# Altium PCB vehRec.PcbDoc
Units mil, origin at the board's own origin, x right, y up, seen from the top; angles counter-clockwise.
Board outline 3900 x 3300 mil, 2 copper layers (Top Layer, Bottom Layer); 122 components, 143 nets, 464 pads, 150 vias.
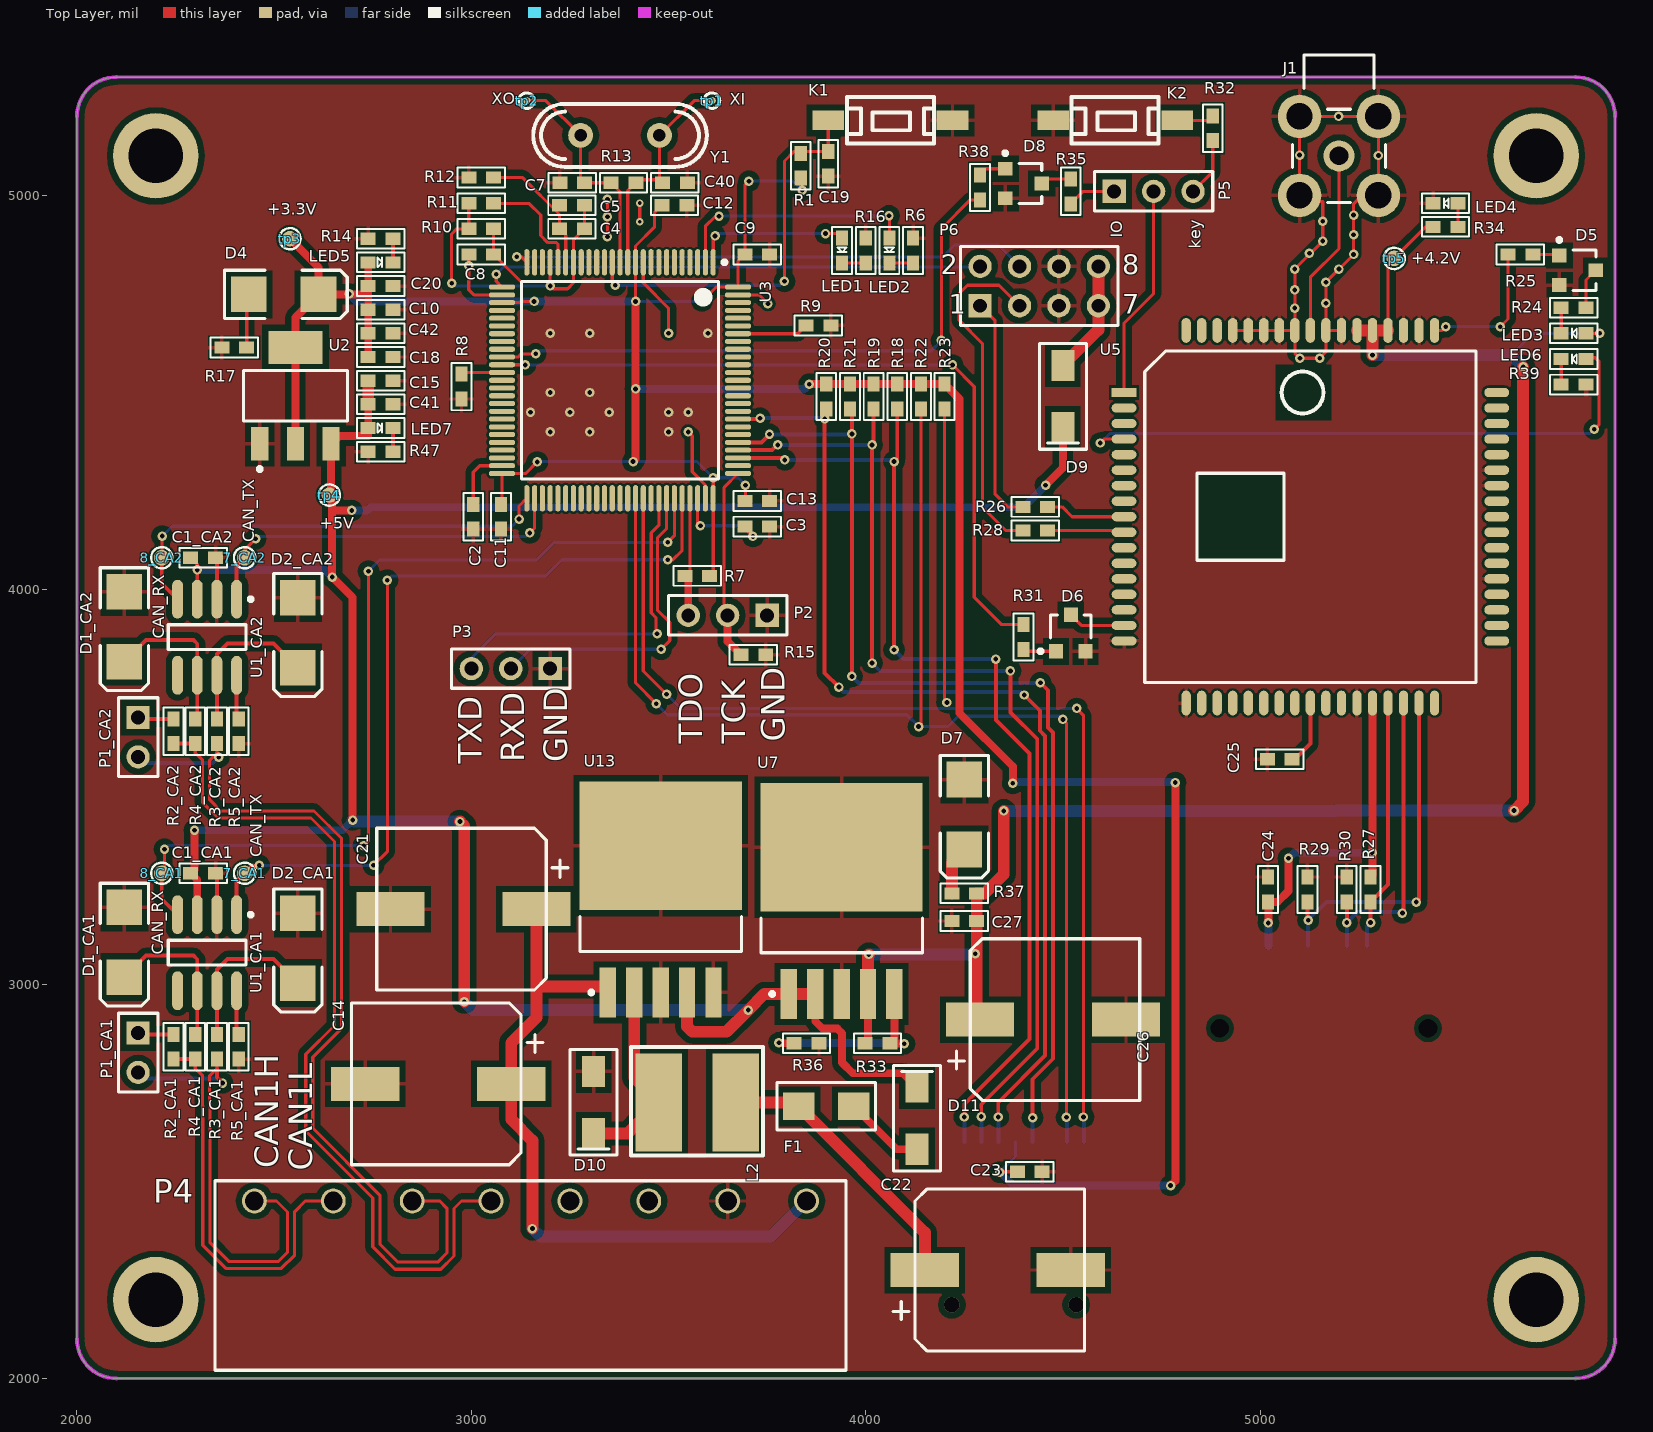
[diagram p0: Top Layer view]
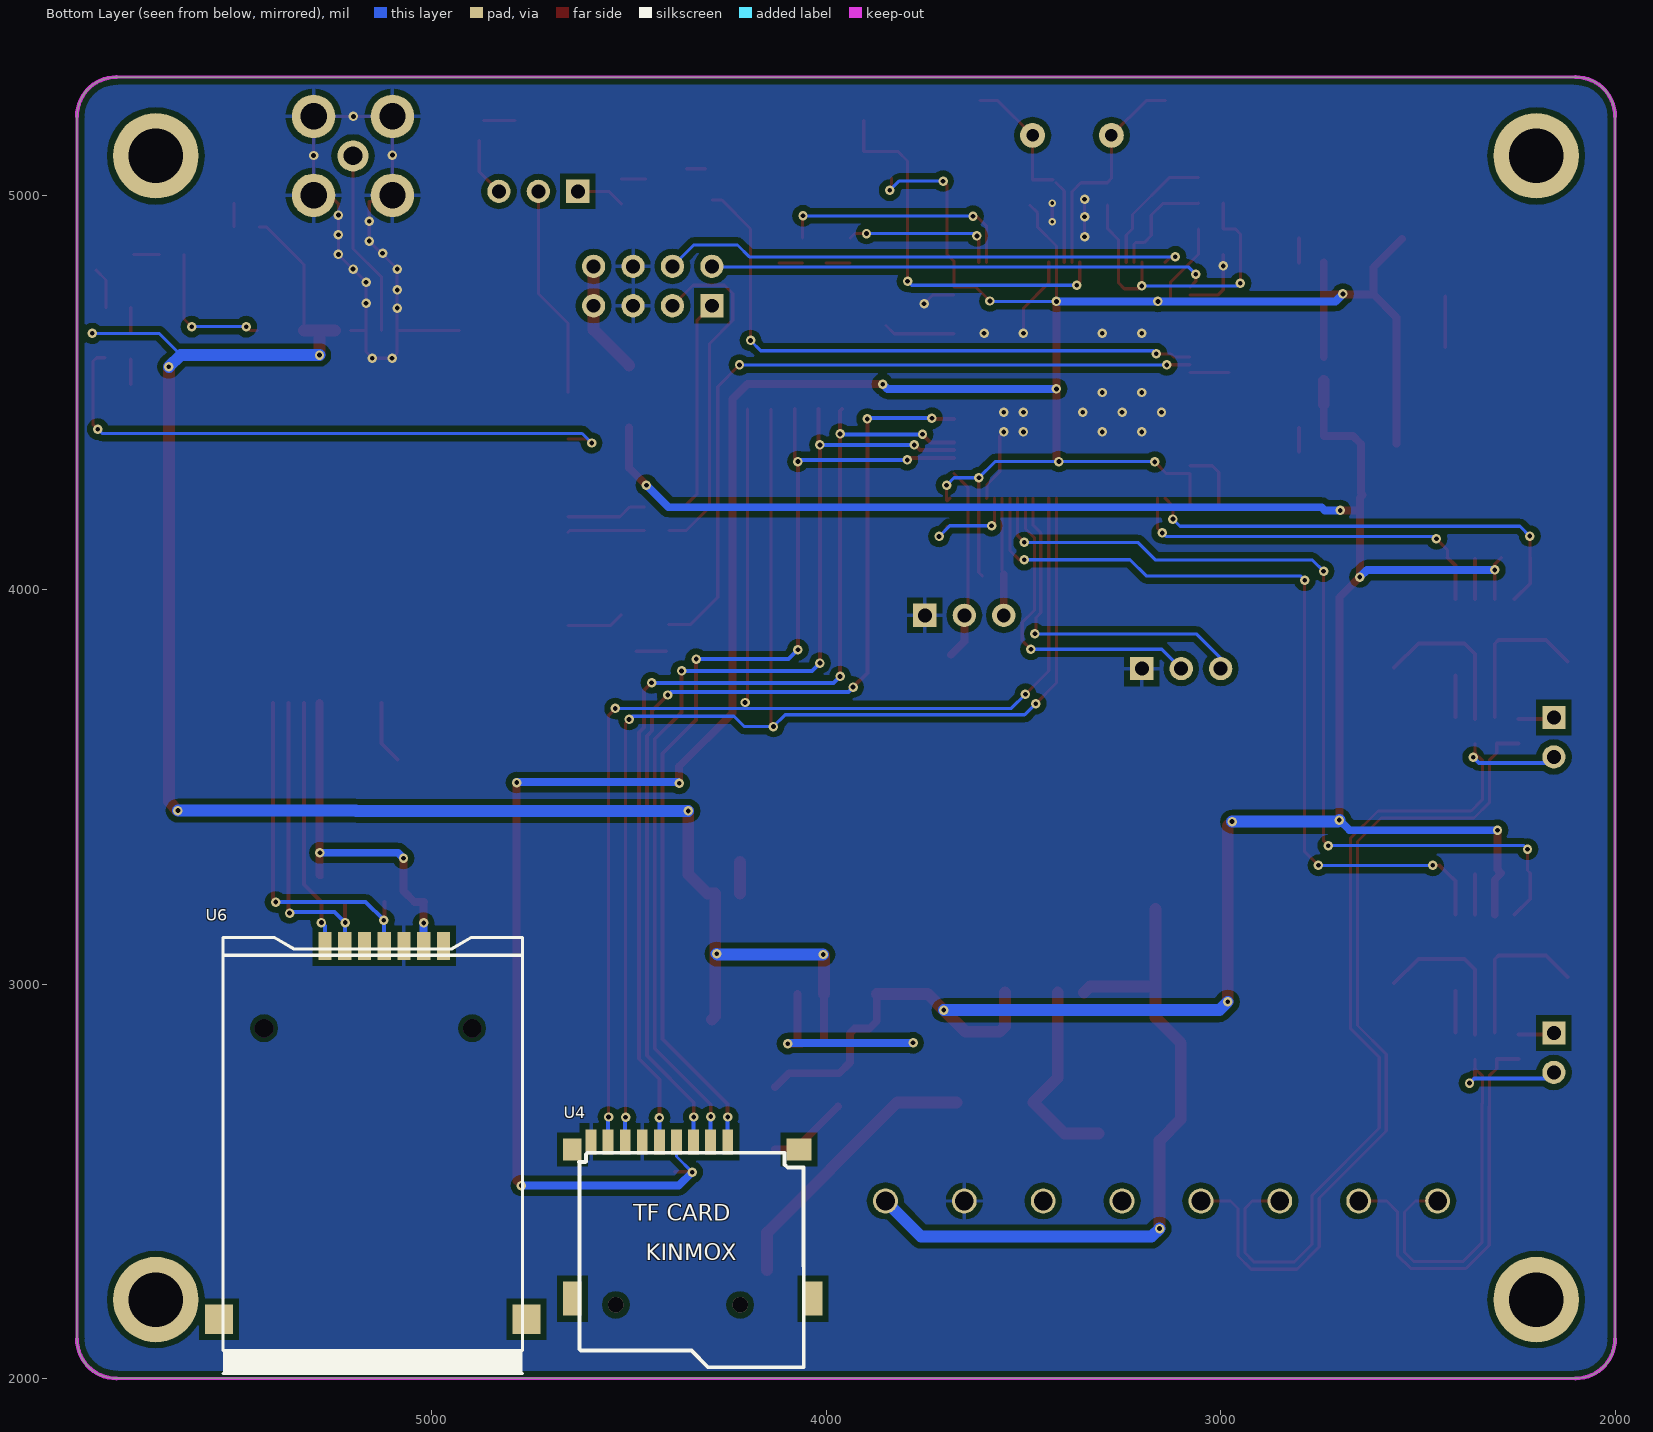
[diagram p1: Bottom Layer view, seen from below]

## Layer stack, top to bottom
Top Layer: signal copper 1.4
Dielectric: dielectric 12.6, FR-4, Dk 4.8
Bottom Layer: signal copper 1.4

## Board outline
2100,2000 cw(c2100,2100) 2000,2100 2000,5200 cw(c2100,5200) 2100,5300 5800,5300 cw(c5800,5200) 5900,5200 5900,2100 cw(c5800,2100) 5800,2000

## Design rules (kind name [scope] priority, off if disabled: settings)
Clearance Clearance_2 [(InComponent('U3') or InComponent('U5'))] p1: gap=6
Clearance Clearance_1 [(InPolygon)] p2: gap=15
Clearance [All] p3: gap=8
ComponentClearance [All] p1 off: gap=10 collisioncheckmode=3 verticalgap=10 showdistances=FALSE
DiffPairsRouting [All] p1: maxlimit=10 minlimit=10 mostfreqgap=10 maxuncoupledlength=500
Height [All] p1 off: minheight=0 maxheight=1000 prefheight=500
MinimumSolderMaskSliver [All] p1 off: minsoldermaskwidth=10
PolygonConnect PolygonConnect_1 [IsVia] p1: connectstyle=Direct reliefconductorwidth=10 reliefentries=4 polygonreliefangle="90 Angle"
PolygonConnect [All] p2: connectstyle=Relief reliefconductorwidth=10 reliefentries=4 polygonreliefangle="90 Angle"
RoomDefinition SD [InComponentClass('SD')] p1 off: confinementstyle=ConfineIn formatcopy=TRUE lockcomponents=FALSE outline 0,0 2000,0 2000,1000 0,1000
RoomDefinition GPRS [InComponentClass('GPRS')] p2 off: confinementstyle=ConfineIn formatcopy=TRUE lockcomponents=FALSE outline 0,0 2000,0 2000,1000 0,1000
RoomDefinition CPU [InComponentClass('CPU')] p3 off: confinementstyle=ConfineIn formatcopy=TRUE lockcomponents=FALSE outline 0,0 2000,0 2000,1000 0,1000
RoomDefinition CA2 [InComponentClass('CA2')] p4 off: confinementstyle=ConfineIn formatcopy=TRUE lockcomponents=FALSE outline 2002,4160 2002,3300 2700,3300 2700,4160
RoomDefinition CA1 [InComponentClass('CA1')] p5 off: confinementstyle=ConfineIn formatcopy=TRUE lockcomponents=FALSE outline 2002,3360 2002,2500 2700,2500 2700,3360
RoutingVias [All] p1: holewidth=28 width=50 viastyle="Through Hole" minholewidth=2 minwidth=5 maxholewidth=280 maxwidth=500
SilkToSilkClearance [All] p1 off: silktosilkclearance=10
SilkscreenOverComponentPads [All] p1 off: minsilkscreentomaskgap=10
SolderMaskExpansion [All] p1: expansion=4
TestPointUsage [All] p1: valid=0 allowmultiple=FALSE
Testpoint [All] p1: side=15 testpointundercomponent=TRUE minsize=40 maxsize=100 preferedsize=60 minholesize=0 maxholesize=40 preferedholesize=32 testpointgrid=1 style=1023 order=0-112345678
Width [All] p1: maxlimit=100 minlimit=6 preferedwidth=10
18 further rules are at their usual default settings.

## Classes and differential pairs
channel class CAN: CA1 CA2
net class SDIO_D[0..3]: SDIO_D0 SDIO_D1 SDIO_D2 SDIO_D3
net class CAN_TX[1..2]: CAN_TX1 CAN_TX2
net class CAN_RX[1..2]: CAN_RX1 CAN_RX2
net class CAN_P[1..2]: CAN_P1 CAN_P2
net class CAN_N[1..2]: CAN_N1 CAN_N2
component class GPRS: C24 C25 C26 C27 D5 D6 D7 D8 J1 K2 LED3 LED4 LED6 P5 R24 R25 R26 R27 R28 R29 R30 R31 R32 R33 R34 R35 R36 R37 R38 R39 tp5 U5 U6 U7
component class CA2: 7_CA2 8_CA2 C1_CA2 D1_CA2 D2_CA2 P1_CA2 R2_CA2 R3_CA2 R4_CA2 R5_CA2 U1_CA2
component class CA1: 7_CA1 8_CA1 C1_CA1 D1_CA1 D2_CA1 P1_CA1 R2_CA1 R3_CA1 R4_CA1 R5_CA1 U1_CA1
component class CPU: C2 C3 C4 C5 C7 C8 C9 C10 C11 C12 C13 C14 C15 C18 C19 C20 C21 C22 C40 C41 C42 D4 D9 D10 D11 F1 K1 L2 LED1 LED2 LED5 LED7 P2 P3 P4 P6 R1 R6 R7 R8 R9 R10 R11 R12 R13 R14 R15 R16 R17 R47 tp1 tp2 tp3 tp4 U2 U3 U13 Y1
component class SD: C23 R18 R19 R20 R21 R22 R23 U4
differential pair CAN_CA22: +CAN_P2 -CAN_N2
differential pair CAN_CA11: +CAN_P1 -CAN_N1

## Components (designator, comment, footprint, x,y, rotation, side; value= is the part's Value field where it differs from the comment)
7_CA1 "CAN_TX" testPoint 2425,3281 r0 top (schematic designator 7)
7_CA2 "CAN_TX" testPoint 2425,4081 r0 top (schematic designator 7)
8_CA1 "CAN_RX" testPoint 2215,3281 r0 top (schematic designator 8)
8_CA2 "CAN_RX" testPoint 2215,4081 r0 top (schematic designator 8)
C1_CA1 "104" 0603_ 2320,3281 r180 top (schematic designator C1)
C1_CA2 "104" 0603_ 2320,4081 r180 top (schematic designator C1)
C2 "10u" 0603_ 3005,4185 r90 top
C3 "10u" 0603_ 3725,4160 r180 top
C4 "104" 0603_ 3255,4915 r180 top
C5 "10u" 0603_ 3255,4975 r180 top
C7 "22p" 0603_ 3256,5032 r0 top
C8 "104" 0603_ 3025,4850 r180 top
C9 "104" 0603_ 3725,4850 r0 top
C10 "104" 0603_ 2770,4710 r0 top
C11 "104" 0603_ 3075,4185 r270 top
C12 "104" 0603_ 3515,4975 r0 top
C13 "104" 0603_ 3725,4225 r0 top
C14 "220uF" "Cap - 10mmx10mm" 3101,2747 r90 top
C15 "10u" 0603_ 2770,4530 r180 top
C18 "10u" 0603_ 2770,4590 r180 top
C19 "104" 0603_ 3905,5080 r270 top
C20 "10u" 0603_ 2770,4770 r180 top
C21 "220uF" "Cap - 10mmx10mm" 3165,3190 r90 top
C22 "220uF" "Cap - 10mmx10mm" 4150,2275 r270 top
C23 "104" 0603_ 4416,2524 r180 top
C24 "104" 0603_ 5020,3240 r270 top
C25 "10u" 0603_ 5050,3570 r0 top
C26 "470uF" "Cap - 10mmx10mm" 4290,2910 r270 top
C27 "104" 0603_ 4250,3160 r0 top
C40 "22p" 0603_ 3516,5032 r180 top
C41 "104" 0603_ 2770,4470 r0 top
C42 "104" 0603_ 2770,4650 r0 top
D1_CA1 "SMBJ12CA" SMB 2120,3106 r270 top (schematic designator D1)
D1_CA2 "SMBJ12CA" SMB 2120,3906 r270 top (schematic designator D1)
D2_CA1 "SMBJ12CA" SMB 2560,3091 r270 top (schematic designator D2)
D2_CA2 "SMBJ12CA" SMB 2560,3891 r270 top (schematic designator D2)
D4 "TVS" SMB 2524,4749 r0 top
D5 "s8050" SOT-23(bce) 5805,4810 r270 top
D6 "s8050" SOT-23(bce) 4520,3890 r0 top
D7 "TVS" SMB 4250,3430 r270 top
D8 "s8050" SOT-23(bce) 4400,5030 r270 top
D9 "SS54" SMA 4500,4490 r270 top
D10 "ss54" SMA 3310,2700 r270 top
D11 "SS54" SMA 4130,2660 r90 top
F1 "3A" 3216 3830,2690 r90 top
J1 "COAX-F" MCX5.08-H5 5200,5100 r270 top
K1 "k" key-2pin 4220,5190 r270 top
K2 "k" key-2pin 4790,5190 r270 top
L2 "33uH" "Induct 7*7*4" 3670,2700 r0 top
LED1 "red" 0603_diode 3940,4860 r270 top
LED2 "red" 0603_diode 4060,4860 r270 top
LED3 "red" 0603_diode 5795,4650 r180 top
LED4 "red" 0603_diode 5470,4980 r180 top
LED5 "red" 0603_diode 2770,4830 r0 top
LED6 "red" 0603_diode 5795,4585 r180 top
LED7 "red" 0603_diode 2770,4410 r0 top
P1_CA1 "Header 2" HDR1X2 2155,2876 r270 top (schematic designator P1)
P1_CA2 "Header 2" HDR1X2 2155,3676 r270 top (schematic designator P1)
P2 "Header 3" HDR1X3 3750,3935 r180 top
P3 "Header 3" HDR1X3 3200,3800 r180 top
P4 "header_8p" WJ2EDG5.08-8P 3850,2450 r180 top locked
P5 "Header 3" HDR1X3 4630,5010 r0 top
P6 "Header 4X2" HDR2X4 4290,4720 r0 top
R1 "10k" 0603_ 3835,5075 r90 top
R2_CA1 "120R" 0603_ 2245,2841 r90 top (schematic designator R2)
R2_CA2 "120R" 0603_ 2245,3641 r90 top (schematic designator R2)
R3_CA1 "22R" 0603_ 2355,2841 r90 top (schematic designator R3)
R3_CA2 "22R" 0603_ 2355,3641 r90 top (schematic designator R3)
R4_CA1 "22R" 0603_ 2300,2841 r90 top (schematic designator R4)
R4_CA2 "22R" 0603_ 2300,3641 r90 top (schematic designator R4)
R5_CA1 "10k" 0603_ 2410,2841 r90 top (schematic designator R5)
R5_CA2 "10k" 0603_ 2410,3641 r90 top (schematic designator R5)
R6 "10k" 0603_ 4120,4860 r90 top
R7 "10k" 0603_ 3573,4035 r180 top
R8 "10k" 0603_ 2975,4515 r270 top
R9 "10k" 0603_ 3880,4670 r0 top
R10 "0R" 0603_ 3025,4915 r0 top
R11 "0R" 0603_ 3025,4980 r180 top
R12 "0R" 0603_ 3025,5045 r180 top
R13 "1M" 0603_ 3386,5032 r0 top
R14 "1k" 0603_ 2770,4890 r0 top
R15 "10k" 0603_ 3715,3835 r0 top
R16 "10k" 0603_ 4000,4860 r90 top
R17 "22R" 0603_ 2399,4614 r0 top
R18 "10k" 0603_ 4080,4490 r90 top
R19 "10k" 0603_ 4020,4490 r90 top
R20 "10k" 0603_ 3900,4490 r90 top
R21 "10k" 0603_ 3960,4490 r90 top
R22 "10k" 0603_ 4140,4490 r90 top
R23 "10k" 0603_ 4200,4490 r90 top
R24 "10k" 0603_ 5795,4715 r180 top
R25 "10k" 0603_ 5660,4850 r180 top
R26 "22R" 0603_ 4430,4210 r0 top
R27 "10k" 0603_ 5280,3240 r90 top
R28 "22R" 0603_ 4430,4150 r0 top
R29 "10k" 0603_ 5120,3240 r270 top
R30 "10k" 0603_ 5220,3240 r270 top
R31 "10k" 0603_ 4400,3880 r90 top
R32 "1k" 0603_ 4880,5170 r270 top
R33 "100k" 0603_ 4030,2850 r180 top
R34 "10k" 0603_ 5470,4920 r180 top
R35 "1k" 0603_ 4520,5010 r270 top
R36 "43k" 0603_ 3850,2850 r180 top
R37 "22R" 0603_ 4250,3230 r0 top
R38 "10k" 0603_ 4290,5020 r270 top
R39 "10k" 0603_ 5795,4520 r180 top
R47 "10k" 0603_ 2770,4350 r180 top
tp1 "XI" testPoint_s 3610,5240 r0 top
tp2 "XO" testPoint_s 3140,5240 r90 top
tp3 "+3.3V" testPoint 2540,4890 r0 top
tp4 "+5V" testPoint 2640,4240 r0 top
tp5 "+4.2V" testPoint 5340,4840 r0 top
U1_CA1 "TJA1051T" SOP8 2405,3176 r270 top (schematic designator U1)
U1_CA2 "TJA1051T" SOP8 2405,3976 r270 top (schematic designator U1)
U2 "AMS1117 -3.3V" SOT-223 2554,4492 r0 top
U3 "STM32F407VE" LQFP100-M 3377,4531 r270 top
U4 "tfCard" tfCard 4250,2600 r270 bottom
U5 "SIM900" SIM900 4655,4500 r0 top locked
U6 "SIM_card" SIM_Card 5150,2150 r180 bottom
U7 "MIC29302BU" TO-263(S) 3805,2975 r0 top
U13 "LM2596S-5.0" TS5B_N 3480,3215 r90 top
Y1 "8M" xtal 3377,5152 r180 top

## Footprints (in the part's own frame and the unit in brackets; to place one, negate y for a bottom-side part, rotate by r counter-clockwise, add the part's x,y. Pads: shape width x height; smd on the part's side, far side on the other; paste and mask are expansions set on the pad)
0603_ [mil]
  rect 38x31 smd: 1(-31.5,0) 2(31.5,0)
  silkscreen extent -60,-25 60,25
0603_diode [mil]
  rect 38x31 smd: 1(-31.5,0) 2(31.5,0)
  silkscreen extent -60,-25 60,25
3216 [mil]
  rect 70x80 smd: 1(0,0) 2(0,-140)
  silkscreen extent -60,-195 60,55
"Cap - 10mmx10mm" [mm]
  rect 2.2x4.4 smd: 1(0,0) 2(0,9.398)
  silkscreen extent -5.21,-2.03 5.21,10.29, body extent -5.21,-0.63 5.21,10.29, height 8
HDR1X2 [mm] "Connector; Header; 2 Position"
  rect 1.5x1.5 hole 0.9: 1(0,0)
  round 1.5 hole 0.9: 2(2.54,0)
  silkscreen extent -1.27,-1.27 3.81,1.27
HDR1X3 [mm] "Connector; Header; 3 Position"
  rect 1.5x1.5 hole 0.9: 1(0,0)
  round 1.5 hole 0.9: 2(2.54,0) 3(5.08,0)
  silkscreen extent -1.27,-1.27 6.35,1.27
HDR2X4 [mm] "Connector; Header; 4x2 Position"
  rect 1.5x1.5 hole 0.9: 1(0,0)
  round 1.5 hole 0.9: 2(0,2.54) 3(2.54,0) 4(2.54,2.54) 5(5.08,0) 6(5.08,2.54) 7(7.62,0) 8(7.62,2.54)
  silkscreen extent -1.27,-1.27 8.89,3.81
"Induct 7*7*4" [mm]
  rect 3x6.3 smd: 1(-4.953,0) 2(0,0)
  silkscreen extent -6.73,-3.43 1.77,3.57, body extent -6,-3 1,3, height 3
key-2pin [mil]
  rect 50x80 smd: 1(0,0) 2(0,-314.96)
  silkscreen extent -59,-268 59,-47
LQFP100-M [mm]
  oval 1.7x0.33 smd: 1(-7.6,6) 2(-7.6,5.5) 3(-7.6,5) 4(-7.6,4.5) 5(-7.6,4) 6(-7.6,3.5) 7(-7.6,3) 8(-7.6,2.5) 9(-7.6,2) 10(-7.6,1.5) 11(-7.6,1) 12(-7.6,0.5) 13(-7.6,0) 14(-7.6,-0.5) 15(-7.6,-1) 16(-7.6,-1.5) 17(-7.6,-2) 18(-7.6,-2.5) 19(-7.6,-3) 20(-7.6,-3.5) 21(-7.6,-4) 22(-7.6,-4.5) 23(-7.6,-5) 24(-7.6,-5.5) 25(-7.6,-6) 51(7.6,-6) 52(7.6,-5.5) 53(7.6,-5) 54(7.6,-4.5) 55(7.6,-4) 56(7.6,-3.5) 57(7.6,-3) 58(7.6,-2.5) 59(7.6,-2) 60(7.6,-1.5) 61(7.6,-1) 62(7.6,-0.5) 63(7.6,0) 64(7.6,0.5) 65(7.6,1) 66(7.6,1.5) 67(7.6,2) 68(7.6,2.5) 69(7.6,3) 70(7.6,3.5) 71(7.6,4) 72(7.6,4.5) 73(7.6,5) 74(7.6,5.5) 75(7.6,6)
  oval 0.33x1.7 smd: 26(-6,-7.6) 27(-5.5,-7.6) 28(-5,-7.6) 29(-4.5,-7.6) 30(-4,-7.6) 31(-3.5,-7.6) 32(-3,-7.6) 33(-2.5,-7.6) 34(-2,-7.6) 35(-1.5,-7.6) 36(-1,-7.6) 37(-0.5,-7.6) 38(0,-7.6) 39(0.5,-7.6) 40(1,-7.6) 41(1.5,-7.6) 42(2,-7.6) 43(2.5,-7.6) 44(3,-7.6) 45(3.5,-7.6) 46(4,-7.6) 47(4.5,-7.6) 48(5,-7.6) 49(5.5,-7.6) 50(6,-7.6) 76(6,7.6) 77(5.5,7.6) 78(5,7.6) 79(4.5,7.6) 80(4,7.6) 81(3.5,7.6) 82(3,7.6) 83(2.5,7.6) 84(2,7.6) 85(1.5,7.6) 86(1,7.6) 87(0.5,7.6) 88(0,7.6) 89(-0.5,7.6) 90(-1,7.6) 91(-1.5,7.6) 92(-2,7.6) 93(-2.5,7.6) 94(-3,7.6) 95(-3.5,7.6) 96(-4,7.6) 97(-4.5,7.6) 98(-5,7.6) 99(-5.5,7.6) 100(-6,7.6)
  silkscreen extent -7.72,-6.35 6.35,6.85, body extent -7.05,-7.05 7.05,7.05, height 1.6
MCX5.08-H5 [mm] "Connector; RF Coaxial, MCX, Thru-Hole; 5 Position; Right-Angle"
  round 2 hole 1.2: 1(0,0)
  round 2.8 hole 1.7: 2(-2.54,-2.54) 3(2.54,-2.54) 4(2.54,2.54) 5(-2.54,2.54)
  silkscreen extent -6.5,-3 3,3
SIM900 [mm]
  rect 1.6x0.6 smd: 1(0,0)
  oval 1.6x0.6 smd: 2(0,-1) 3(0,-2) 4(0,-3) 5(0,-4) 6(0,-5) 7(0,-6) 8(0,-7) 9(0,-8) 10(0,-9) 11(0,-10) 12(0,-11) 13(0,-12) 14(0,-13) 15(0,-14) 16(0,-15) 17(0,-16) 35(24,-16) 36(24,-15) 37(24,-14) 38(24,-13) 39(24,-12) 40(24,-11) 41(24,-10) 42(24,-9) 43(24,-8) 44(24,-7) 45(24,-6) 46(24,-5) 47(24,-4) 48(24,-3) 49(24,-2) 50(24,-1) 51(24,0)
  oval 0.6x1.6 smd: 18(4,-20) 19(5,-20) 20(6,-20) 21(7,-20) 22(8,-20) 23(9,-20) 24(10,-20) 25(11,-20) 26(12,-20) 27(13,-20) 28(14,-20) 29(15,-20) 30(16,-20) 31(17,-20) 32(18,-20) 33(19,-20) 34(20,-20) 52(20,4) 53(19,4) 54(18,4) 55(17,4) 56(16,4) 57(15,4) 58(14,4) 59(13,4) 60(12,4) 61(11,4) 62(10,4) 63(9,4) 64(8,4) 65(7,4) 66(6,4) 67(5,4) 68(4,4)
  silkscreen extent 1.33,-18.67 22.67,2.67, body extent 0,-20 24,4, height 5
SIM_Card [mm]
  rect 0.85x1.8 smd: 0(4.55,24.05) 1(3.28,24.05) 2(0.74,24.05) 3(-1.8,24.05) 5(2.01,24.05) 6(-0.53,24.05) 7(-3.07,24.05)
  rect 1.8x1.9 smd: 9(-9.9,0) 9(9.9,0)
  silkscreen extent -9.65,-3.5 9.65,24.6, body extent -9.65,-2 9.65,24.6, height 1
SMA [mm]
  rect 2x1.5 smd: A(-2,0) K(2,0)
  silkscreen extent -3.4,-1.51 3.4,1.51
SMB [mm]
  rect 2.3x2.3 smd: A(-2.25,0) K(2.25,0)
  silkscreen extent -3.8,-1.55 4.1,1.55, body extent -3,-1.5 3,1.5, height 2.01
SOP8 [mm]
  oval 2.5x0.7 smd: 1(0,0) 2(0,-1.27) 3(0,-2.54) 4(0,-3.81) 5(4.9,-3.81) 6(4.9,-2.54) 7(4.9,-1.27) 8(4.9,0)
  silkscreen extent -0.12,-4.41 3.25,1.03, body extent 0.45,-4.41 4.45,0.6, height 1.75
SOT-23(bce) [mm]
  rect 0.9x0.95 smd: b(-0.95,-1.175) c(0,1.175) e(0.95,-1.175)
  silkscreen extent -2.07,-1.3 1.3,1.18
SOT-223 [mm]
  rect 1.1x2.15 smd: 1(-2.3,-3.1) 2(0,-3.1) 3(2.3,-3.1)
  rect 3.5x2.15 smd: 4(0,3.1)
  silkscreen extent -3.35,-4.85 3.35,1.63
testPoint [mm]
  round 1 smd: 1(0,0)
  silkscreen extent -0.68,-0.69 0.69,0.69
testPoint_s [mm] "0.5x0.5mm"
  round 0.5 smd: 1(0,0)
  silkscreen extent -0.5,-0.5 0.5,0.5
tfCard [mm]
  rect 1.6x0.7 smd: 1(0,0) 2(0,-1.1) 3(0,-2.2) 4(0,-3.3) 5(0,-4.4) 6(0,-5.5) 7(0,-6.6) 8(0,-7.7) 9(0,-8.8)
  rect 1.4x1.2 smd: 10(0.5,-10)
  rect 1.4x1.6 smd: 11(0.5,4.6)
  rect 2.2x1.2 smd: 12(10.1,5.5) 13(10.1,-10)
  silkscreen extent 0.7,-9.59 14.52,4.9
TO-263(S) [mm]
  rect 1.05x3.2 smd: 1(0,0) 2(1.7,0) 3(3.4,0) 4(5.1,0) 5(6.8,0)
  rect 10.45x8.3 smd: 6(3.4,9.45)
  silkscreen extent -1.8,-0.12 8.6,4.9, body extent -1.8,2.65 8.6,12.05, height 4.65
TS5B_N [mm] "D2-PAK, 6-Leads, Body 8.6x10.2mm, Pitch 1.7mm, Lead Span 14.1mm, IPC Medium Density"
  rect 3.2x1.05 smd: 1(-6,3.4) 2(-6,1.7) 3(-6,0) 4(-6,-1.7) 5(-6,-3.4)
  rect 8.3x10.45 smd: 6(3.45,0)
  silkscreen extent -6.12,-5.2 -1.1,5.2, body extent -3.35,-5.2 6.05,5.2, height 4.65
WJ2EDG5.08-8P [mm]
  round 1.6 hole 1.2: 1(0,0) 2(5.08,0) 3(10.16,0) 4(15.24,0) 5(20.32,0) 6(25.4,0) 7(30.48,0) 8(35.56,0)
  silkscreen extent -2.54,-1.3 38.1,10.9
xtal [mm]
  round 1.6 hole 0.8: 1(2.54,0) 2(-2.54,0)
  silkscreen extent -5.59,-2.03 5.59,2.03, body extent -5.61,-2.04 5.61,2.04, height 2

## Part data
7_CA1 7_CA2 8_CA1 8_CA2 tp1 tp2 tp3 tp4 tp5: library part pad
C1_CA1 C1_CA2 C2 C3 C4 C5 C7 C8 C9 C10 C11 C12 C13 C15 C18 C19 C20 C23 C24 C25 C27 C40 C41 C42: library part cap
C14 C21 C22 C26: library part cap-pol
D1_CA1 D1_CA2 D2_CA1 D2_CA2 D4 D7 D9 D10 D11: library part diode
D5 D6 D8: library part NPN
F1: library part FUSE
J1: "RF Coaxial PCB Connector, MCX; Thru-Hole, Right-Angle Mount Socket, Blunt Post Terminal, 50 Ohm Impedance"
K1 K2: library part SW
L2: library part inductor
LED1 LED2 LED3 LED4 LED5 LED6 LED7: library part led
P1_CA1 P1_CA2: "Header, 2-Pin"
P2 P3 P5: "Header, 3-Pin"
P6: "Header, 4-Pin, Dual row"
R1 R2_CA1 R2_CA2 R3_CA1 R3_CA2 R4_CA1 R4_CA2 R5_CA1 R5_CA2 R6 R7 R8 R9 R10 R11 R12 R13 R14 R15 R16 R17 R18 R19 R20 R21 R22 R23 R24 R25 R26 R27 R28 R29 R30 R31 R32 R33 R34 R35 R36 R37 R38 R39 R47: library part res
U1_CA1 U1_CA2: library part PCA82C250Y
U2: library part AMS1117
U13: library part LM2596S-3.3, "SIMPLE SWITCHER Power Converter 150 KHz 3A Step-Down Voltage Regulator"
Y1: library part xtal

## Free pads (board coordinates)
  round 216.54 hole 137.8: 0(5700,2200) 1(5700,5100) 2(2200,5100) 3(2200,2200)

## Via types
v1: diameter 24, hole 12, Top Layer to Bottom Layer, 144 vias
v2: diameter 39.37, hole 47.24, Top Layer to Bottom Layer, 2 vias
v3: diameter 39.37, hole 39.37, Top Layer to Bottom Layer, tented both sides, 2 vias
v4: diameter 20, hole 10, Top Layer to Bottom Layer, 2 vias

## Nets (pads, with @x,y where several pads share a name; then routed paths per layer and width w, separated by ;. In a path a pad name is that pad's centre, name@x,y a point inside that pad or via, vN(x,y) a via of type N, cw(c..) or ccw(c..) an arc to the next point about the centre after c; other vN are vias at no path point)
/CS_LAN: U3.29
/RST_LAN: U3.67
BOOT0: R9.1 U3.94 | length 180.9
  Top Layer w8: U3.94 3827.61,4649.11 R9.1
CAN_N1: P4.7 R2_CA1.1 R4_CA1.1 | length 1025.6
  Top Layer w8: R4_CA1.1 2300,2786 2318.5,2767.5 2318.5,2690.54 2319,2690.04 2319,2337.54 2377.54,2279 2518.46,2279 2552,2312.54 2552,2423 2579,2450 P4.7
  Top Layer w10: R2_CA1.1 R4_CA1.1
CAN_N2: P4.5 R2_CA2.1 R4_CA2.1 | length 2181.7
  Top Layer w8: R4_CA2.1 2300,3586 2318.5,3567.5 2318.5,3460.04 2357.54,3421 2593.54,3421 2653,3361.54 2653,2895 2580,2822 2580,2627.54 2750,2457.54 2750,2333.54 2806.54,2277 2922.46,2277 2956,2310.54 2956,2431 2975,2450 P4.5
  Top Layer w10: R2_CA2.1 R4_CA2.1
CAN_P1: P1_CA1.2 P4.8 R3_CA1.1 | length 1164.4
  Top Layer w8: R3_CA1.1 2355,2786 2336.5,2767.5 2336.5,2698 2337,2697.5 2337,2345 2385,2297 2511,2297 2534,2320 2534,2422 2506,2450 P4.8
  Top Layer w10: 2355,2786 2355,2763 v1(2369,2749)
  Bottom Layer w10: P1_CA1.2 2170,2761 2357,2761 v1(2369,2749)
CAN_P2: P1_CA2.2 P4.6 R3_CA2.1 | length 2290.7
  Top Layer w8: R3_CA2.1 2355,3586 2336.5,3567.5 2336.5,3467.5 2365,3439 2601,3439 2671,3369 2671,2887.54 2598,2814.54 2598,2635 2768,2465 2768,2341 2814,2295 2915,2295 2938,2318 2938,2432 2920,2450 P4.6
  Top Layer w10: v1@2355,3586 2355,3579.84 v1(2359.42,3575.42)
  Bottom Layer w10: P1_CA2.2 2170,3561 2345,3561 v1(2359.42,3575.42)
CAN_RX1: 8_CA1.1 U1_CA1.4 U3.70 | length 2303.1
  Top Layer w8: 8_CA1.1 2222,3288 v1(2222,3342) ; v1(2727,3351) 2739,3363 v1(2739,4047) ; v1(3498,4120) 3514.8,4136.8 U3.70
  Top Layer w10: 8_CA1.1 2215,3216 U1_CA1.4
  Bottom Layer w8: v1(2222,3342) 2231,3351 v1(2727,3351) ; v1(2739,4047) 2767,4075 3165,4075 3210,4120 v1(3498,4120)
CAN_RX2: 8_CA2.1 U1_CA2.4 U3.51 | length 1160.8
  Top Layer w8: 8_CA2.1 2216,4082 v1(2216,4136) ; v1(3121,4179) 3121,4212.01 U3.51
  Top Layer w10: 8_CA2.1 2215,4016 U1_CA2.4
  Bottom Layer w8: v1(2216,4136) 2241,4161 3103,4161 v1(3121,4179)
CAN_TX1: 7_CA1.1 U1_CA1.1 U3.71 | length 2097.1
  Top Layer w8: 2445,3301 v1(2462,3301) ; v1(2752,3301) 2787,3336 v1(2787,4024) ; v1(3498,4076) 3511,4076 3534.48,4099.48 U3.71
  Top Layer w10: U1_CA1.1 2405,3261 7_CA1.1 2445,3301
  Bottom Layer w8: v1(2462,3301) v1(2752,3301) ; v1(2787,4024) 2798,4035 3189,4035 3230,4076 v1(3498,4076)
CAN_TX2: 7_CA2.1 U1_CA2.1 U3.52 | length 967
  Top Layer w8: 7_CA2.1 2425,4101 v1(2453,4129) ; v1(3148,4144) 3160.46,4156.46 U3.52
  Top Layer w10: U1_CA2.1 2405,4061 7_CA2.1
  Bottom Layer w8: v1(2453,4129) 2459,4135 3139,4135 v1(3148,4144)
DGND: C1_CA1.1 C1_CA2.1 C2.1 C3.1 C7.1 C8.2 C9.2 C10.2 C11.2 C12.2 C13.2 C14.2 C15.1 C18.1 C19.2 C20.1 C21.2 C22.2 C23.1 C24.1 C25.1 C26.2 C27.1 C40.1 C41.2 C42.2 D1_CA1.A D1_CA2.A D2_CA1.A D2_CA2.A D5.e D6.e D7.A D8.e D10.A J1.2 J1.3 J1.4 J1.5 K1.1 K2.2 LED4.2 P2.1 P3.1 P4.2 P6.5 P6.6 R5_CA1.1 R5_CA2.1 R6.2 R8.2 R9.2 R12.2 R14.1 R15.2 R16.2 R17.1 R29.1 R30.1 R36.1 R39.1 R47.2 U1_CA1.2 U1_CA2.2 U2.1 U3.10 U3.27 U3.74 U3.99 U4.6 U4.9 U5.17 U5.18 U5.29 U5.39 U5.45 U5.46 U5.53 U5.54 U5.58 U5.59 U5.61 U5.62 U5.63 U5.64 U5.65 U6.5 U7.3 U7.6 U13.3 U13.5 U13.6 | length 2845.8
  Top Layer w8: C8.2 2993.5,4760.5 3006.46,4747.54 U3.27 ; v1(3345,4895) v1(3345,4990) ; v4(3427,4933) v4(3427,4980) ; U3.10 3436.06,4777.94 3500,4714 v1(3500,4650) ; v1(3550,4400) 3560,4390 3560,4298.77 3592.35,4266.41 3592.35,4232.97 U3.74 ; U3.99 3729.46,4747.54 v1(3752,4725) ; U5.65 U5.64 U5.63 U5.62 U5.61 ; U5.58 U5.59 ; U5.61 5088.07,4599.93 v1(5101,4587) v1(5151,4587) 5166.81,4602.81 U5.59 ; U5.61 v1(5088.07,4714) v1(5088.07,4760) v1(5088.07,4813.07) v1(5159,4884) v1(5159,4934) 5159,4984 5116,4984 J1.3 J1.2 J1.5 J1.4 5258,5000 5237,4979 v1(5237,4850) v1(5166.81,4779.81) U5.59
  Top Layer w10: U1_CA1.2 C1_CA1.1@2355,3277.5 ; U1_CA2.2 C1_CA2.1@2355,4077.5
  other v1: 3200,4400 3300,4400 3500,4400 3150,4450 3250,4450 3350,4450 3500,4450 3550,4450 3200,4500 3300,4500 3200,4650 3300,4650 3600,4650 5166.81,4726 5199.96,4812.96 2993.5,4821 5125,4853 5237,4900 3345,4946 5237,4950 5300,5101 5100,5102 5199,5200
DI1: U3.57
DI2: U3.58
DI3: U3.59
DI4: U3.60
DI5: U3.61
DI6: U3.62
DO1: U3.43
DO2: U3.44
DO3: U3.45
DO4: U3.46
FSMC_D2: U3.81
FSMC_D3: U3.82
FSMC_D14: U3.56
GSM_LED: R25.2 U5.52 | length 361.6
  Top Layer w8: U5.52 5461.48,4657.48 v1(5471,4667) ; v1(5609,4667) 5628.5,4686.5 R25.2
  Bottom Layer w8: v1(5471,4667) v1(5609,4667)
GSM_RST: R31.2 U3.36 | length 1907.9
  Top Layer w8: U3.36 3136.63,4570.37 v1(3137,4570) ; v1(4220,4570) 4275,4515 4275,3981 4344.5,3911.5 R31.2
  Bottom Layer w8: v1(3137,4570) v1(4220,4570)
GSM_RXD: P6.3 R28.1 | length 876.6
  Top Layer w8: P6.3 4338,4772 4258,4772 4237,4751 4237,4683 4296,4624 4296,4209 4355,4150 R28.1
GSM_START: R38.2 U3.35 | length 1543
  Top Layer w8: U3.35 3119.06,4590.06 3127,4598 v1(3163,4598) ; v1(4192,4632) 4192,4915 4265.5,4988.5 R38.2
  Bottom Layer w8: v1(3163,4598) 3171,4606 4166,4606 v1(4192,4632)
GSM_TXD: P6.1 R26.1 | length 577.5
  Top Layer w8: P6.1 4328,4682 4328,4242 4360,4210 R26.1
GSMRST: D6.c U5.16 | length 146.1
  Top Layer w8: D6.c 4546.81,3909.45 U5.16
I2C1_CLK: U3.92
I2C1_SDA: U3.93
IGN: P4.3
IGT: P5.2 U5.1 | length 541.1
  Top Layer w8: U5.1 4655,4676 4730,4751 P5.2
LED0: LED1.1 U3.1 | length 398
  Top Layer w8: U3.1 3613.22,4892.22 v1(3618,4897) ; v1(3898,4903) 3928.5,4903 LED1.1
  Bottom Layer w8: v1(3618,4897) 3624,4903 v1(3898,4903)
LED1: LED2.1 U3.2 | length 624.7
  Top Layer w8: U3.2 3593.54,4921.54 3619,4947 v1(3628,4947) ; v1(4059,4948) 4060,4947 LED2.1
  Bottom Layer w8: v1(3628,4947) 3629,4948 v1(4059,4948)
LED2: U3.3
LED3: U3.4
NetC2_2: C2.2 U3.49 | length 161.1
  Top Layer w8: C2.2 3005,4298 3021.46,4314.46 U3.49
NetC3_2: C3.2 U3.73 | length 250.4
  Top Layer w8: U3.73 3573.85,4169.15 v1(3581,4162) ; C3.2 3693.5,4155.5 v1(3714,4135)
  Bottom Layer w8: v1(3581,4162) 3687,4162 v1(3714,4135)
NetC7_2: C7.2 R13.1 tp2.1 U3.13 Y1.1 | length 575.9
  Top Layer w8: tp2.1 3189,5240 Y1.1 3277,5042.5 C7.2 R13.1 3377,5009.5 U3.13
NetC22_1: C22.1 F1.1 L2.2 | length 711.7
  Top Layer w30: L2.2 3820,2700 F1.1 4150,2370 C22.1
NetC25_2: C25.2 U5.26 | length 159.2
  Top Layer w10: C25.2@5087.4,3570 5127.44,3610.04 U5.26
NetC40_2: C40.2 R13.2 tp1.1 U3.12 Y1.2 | length 544.4
  Top Layer w8: U3.12 3396.68,5011.19 R13.2 ; R13.2@3425,5039.5 3477,5039.5 Y1.2 3565,5240 tp1.1
NetD1_CA1_K: D1_CA1.K R4_CA1.2 U1_CA1.6 | length 396.8
  Top Layer w10: D1_CA1.K 2174.58,3072 2296,3072 2305,3063 U1_CA1.6 R4_CA1.2@2305,2877.5
NetD1_CA2_K: D1_CA2.K R4_CA2.2 U1_CA2.6 | length 396.8
  Top Layer w10: D1_CA2.K 2174.58,3872 2296,3872 2305,3863 U1_CA2.6 R4_CA2.2@2305,3677.5
NetD2_CA1_K: D2_CA1.K R3_CA1.2 U1_CA1.7 | length 406.2
  Top Layer w10: R3_CA1.2 U1_CA1.7 2355,3037 2382,3064 2498.42,3064 D2_CA1.K
NetD2_CA2_K: D2_CA2.K R3_CA2.2 U1_CA2.7 | length 406.2
  Top Layer w10: R3_CA2.2 U1_CA2.7 2355,3837 2382,3864 2498.42,3864 D2_CA2.K
NetD4_A: D4.A R17.2 | length 130.1
  Top Layer w8: R17.2 D4.A@2430.5,4744.08
NetD5_b: D5.b R25.1 | length 64.6
  Top Layer w8: R25.1 D5.b@5756.14,4850
NetD5_c: D5.c R24.1 | length 105.3
  Top Layer w8: R24.1 5826.5,4785.24 D5.c
NetD6_b: D6.b R31.1 | length 77.8
  Top Layer w8: R31.1@4404.76,3843.74 D6.b
NetD7_K: D7.K R37.1 | length 79.9
  Top Layer w30: R37.1 D7.K@4218.5,3309.92
NetD8_b: D8.b R38.1 | length 47.8
  Top Layer w8: 4305.9,5067.4 D8.b
NetD8_c: D8.c R35.1 | length 62.2
  Top Layer w8: D8.c@4457.76,5041.5 R35.1
NetD9_A: D9.A P6.7 P6.8 | length 288.5
  Top Layer w30: D9.A 4590,4658.74 P6.7 P6.8
NetD10_K: D10.K L2.1 U13.2 | length 502
  Top Layer w30: D10.K 3396.26,2621.26 L2.1 3413.07,2761.93 U13.2
NetD11_A: D11.A F1.2 | length 205
  Top Layer w20: F1.2 4078.74,2581.26 D11.A
NetJ1_1: J1.1 U5.60 | length 472.6
  Top Layer w8: U5.60 5127.44,4792.44 5200,4865 J1.1
NetK2_1: K2.1 R32.1 | length 78.5
  Top Layer w8: K2.1 R32.1@4868.5,5190
NetLED1_2: LED1.2 R16.1 | length 60
  Top Layer w8: LED1.2 R16.1
NetLED2_2: LED2.2 R6.1 | length 60
  Top Layer w8: LED2.2 R6.1
NetLED3_2: LED3.2 R24.2 | length 65
  Top Layer w8: LED3.2 R24.2
NetLED4_1: LED4.1 R34.1 | length 60
  Top Layer w8: R34.1 LED4.1
NetLED5_2: LED5.2 R14.2 | length 60
  Top Layer w10: LED5.2 R14.2
NetLED6_2: LED6.2 R39.2 | length 65
  Top Layer w8: R39.2 LED6.2
NetLED7_2: LED7.2 R47.1 | length 60
  Top Layer w10: R47.1 LED7.2
NetP1_CA1_1: P1_CA1.1 R2_CA1.2 | length 86.5
  Top Layer w10: P1_CA1.1@2158.5,2872.5 R2_CA1.2
NetP1_CA2_1: P1_CA2.1 R2_CA2.2 | length 86.5
  Top Layer w10: P1_CA2.1@2158.5,3672.5 R2_CA2.2
NetP5_1: P5.1 R35.2 | length 123
  Top Layer w8: R35.2 4551.5,5010 P5.1
NetP5_3: P5.3 R32.2 | length 149.2
  Top Layer w8: P5.3 4880,5060 R32.2
NetR5_CA1_2: R5_CA1.2 U1_CA1.8 | length 105.6
  Top Layer w10: R5_CA1.2@2405,2877.5 U1_CA1.8
NetR5_CA2_2: R5_CA2.2 U1_CA2.8 | length 105.6
  Top Layer w10: R5_CA2.2@2405,3677.5 U1_CA2.8
NetR26_2: R26.2 U5.9 | length 203.8
  Top Layer w8: R26.2 4498,4210 4522.96,4185.04 U5.9
NetR28_2: R28.2 U5.10 | length 195.3
  Top Layer w8: R28.2 4650.67,4150 U5.10
NetR33_1: R33.1 R36.2 U7.5 | length 518.2
  Top Layer w20: v1(3780,2851) 3781,2850 R36.2 ; R33.1@4062.5,2849 v1(4098,2849) ; R33.1@4072.72,2850 U7.5
  Bottom Layer w20: v1(3780,2851) 4096,2851 v1(4098,2849)
PA0/WK_UP: U3.23
PA1: U3.24
PA2: P6.4 U3.25 | length 1341.3
  Top Layer w8: v1(3115,4844) 3126.99,4844 U3.25
  Bottom Layer w8: v1(3115,4844) 4195,4844 4225,4874 4336,4874 P6.4
PA3: P6.2 U3.26 | length 1274.2
  Top Layer w8: v1(3063,4800) 3063,4782.01 U3.26
  Bottom Layer w8: v1(3063,4800) 3081,4818 4288,4818 P6.2
PA5: U3.30
PA6: U3.31
PA7: U3.32
PA13/TMS: P2.3 R7.2 U3.72 | length 287.6
  Top Layer w8: R7.2@3554.17,4047.67 U3.72
  Top Layer w20: P2.3 R7.2@3550,4038.5
PA14/TCK: P2.2 R15.1 U3.76 | length 492
  Top Layer w8: P2.2 3641,3944 3641,4259.57 U3.76
  Top Layer w20: P2.2 3650,3868.5 R15.1
PA15/TDI: U3.77
PB2/BOOT1: R8.1 U3.37 | length 98.6
  Top Layer w8: R8.1@2979.18,4550.69 U3.37
PB3/TDO: U3.89
PB4/TRST: U3.90
PB5: U3.91
PB8: U3.95
PB9: U3.96
PB10: U3.47
PB11: U3.48
PB14: U3.53
PB15: U3.54
PC0: U3.15
PC1: U3.16
PC2: U3.17
PC3: U3.18
PC4: U3.33
PC5: U3.34
PC6: U3.63
PC7: U3.64
PC12: R21.1 U3.80 U4.5 | length 2662.6
  Top Layer w10: U3.80 3735.52,4373.52 v1(3756,4394) ; R21.1 3965,4453.5 v1(3965,3780) ; v1(4423,2661) 4423,2758.72 4475,2810.72 4475,3637.57 4462,3650.57 4462,3745 v1(4443,3764)
  Bottom Layer w10: v1(3756,4394) 3964,4394 v1(3965,4395) ; v1(3965,3780) 3982,3763 4442,3763 v1(4443,3764) ; v1(4423,2661) 4423.23,2660.77 U4.5
PC13: U3.7
PC14: U3.8
PC15: U3.9
PD2: R20.1 U3.83 U4.3 | length 2599.3
  Top Layer w10: U3.83 3729.57,4432.57 v1(3732,4435) ; v1(3896,4433) 3896,3789 v1(3932,3753) ; v1(4336,2663) 4336,2700 4455,2819 4455,3629.28 4442,3642.28 4442,3693 v1(4402,3733)
  Bottom Layer w10: v1(3732,4435) 3894,4435 v1(3896,4433) ; v1(3932,3753) 3944,3741 4394,3741 v1(4402,3733) ; v1(4336,2663) 4336.61,2662.39 U4.3
PD3: U3.84
PD4: U3.85
PD5: U3.86
PD6: U3.87
PD7: U3.88
PD8: U3.55
PE0: U3.97
PE1: U3.98
PE6: U3.5
PE7: U3.38
PE8: U3.39
PE9: U3.40
PE10: U3.41
PE11: U3.42
RING: LED6.1 U5.4 | length 1541.2
  Top Layer w8: v1(4595,4372) 4604.89,4381.89 U5.4 ; LED6.1@5829.5,4588 5850,4588 5859.5,4578.5 5859.5,4419.5 v1(5847,4407)
  Bottom Layer w8: v1(4595,4372) 4619,4396 5836,4396 v1(5847,4407)
RST: C19.1 K1.2 R1.2 U3.14 | length 999.2
  Top Layer w8: U3.14 3357.31,4779.69 v1(3365,4772) ; v1(3794,4782) 3794,5087 3818.5,5111.5 C19.1 C19.1 K1.2
  Bottom Layer w8: v1(3365,4772) 3784,4772 v1(3794,4782)
SDIO_D0: R22.1 U3.65 U4.7 | length 3494.8
  Top Layer w8: U3.65 3416.37,3763.63 v1(3469,3711) ; v1@4140,3659 R22.1 ; v1(4500,3671) 4509,3662 v1(4509,2662)
  Top Layer w10: v1(4134,3653) v1@4140,3659
  Bottom Layer w8: v1(3469,3711) 3497,3683 4104,3683 v1(4134,3653) 4208,3653 4234,3679 4492,3679 v1(4500,3671)
  Bottom Layer w10: v1(4509,2662) 4509.84,2661.16 U4.7
SDIO_D1: R23.1 U3.66 U4.8 | length 3444.6
  Top Layer w8: U3.66 3436.06,3793.94 v1(3495,3735) ; R23.1 4200,3720 v1(4206,3714) ; v1(4535,3699) 4552,3682 v1(4552,2663)
  Bottom Layer w8: v1(3495,3735) 3531,3699 4206,3699 ; v1(4206,3714) 4206,3699 ; v1(4535,3699) 4206,3699
  Bottom Layer w10: v1(4552,2663) 4553.15,2661.85 U4.8
SDIO_D2: R18.1 U3.78 U4.1 | length 2597.6
  Top Layer w10: U3.78 3789.85,4334.15 v1(3795,4329) ; v1(4072,3848) v1(4072,4325) ; v1@4080,4333 R18.1 ; v1(4250,2663) 4250,2696 4415,2861 4415,3585 4330,3670 v1(4330,3824)
  Bottom Layer w10: v1(3795,4329) 4068,4329 v1(4072,4325) ; v1(4072,3848) 4096,3824 v1(4330,3824) ; U4.1 v1(4250,2663)
SDIO_D3: R19.1 U3.79 U4.2 | length 2626.1
  Top Layer w10: U3.79 3762.83,4353.83 3776,4367 v1(3777.08,4367) ; v1(4016,3814) v1(4016,4367) ; v1@4020,4371 R19.1 ; v1(4293,2664) 4293,2695 4435,2837 4435,3621 4367,3689 v1(4367,3794)
  Bottom Layer w10: v1(3777.08,4367) v1(4016,4367) ; v1(4016,3814) 4036,3794 v1(4367,3794) ; v1(4293,2664) 4293.31,2663.69 U4.2
SIMCLK: R30.2 U5.32 U6.3 | length 799.1
  Top Layer w10: v1(5220,3156) R30.2 ; v1(5361,3180) 5363.66,3182.66 U5.32
  Bottom Layer w10: U6.3 5220.87,3155.13 v1(5220,3156) 5247,3183 5358,3183 v1(5361,3180)
SIMDATA: R27.1 U5.31 U6.7 | length 637.9
  Top Layer w10: v1(5280,3156) R27.1 5324.29,3252.79 U5.31
  Bottom Layer w10: U6.7 5270.87,3146.87 v1(5280,3156)
SIMRST: R29.2 U5.33 U6.2 | length 911.9
  Top Layer w10: R29.2 5120,3164 v1(5122,3162) ; v1(5396,3208) 5403.03,3215.03 U5.33
  Bottom Layer w10: U6.2@5122,3097.98 v1(5122,3162) 5168,3208 v1(5396,3208)
SIMVCC: C24.2 R27.2 U5.30 U6.1 | length 918
  Top Layer w10: R27.2 R27.2@5284.92,3276.42
  Top Layer w20: C24.2 5044.5,3208.5 5072,3236 v1(5072,3319) ; v1(5021,3155) C24.2@5021,3207.5 ; R27.2@5284.92,3276.42 U5.30
  Bottom Layer w10: v1@5020.87,3154.87 v1(5021,3155)
  Bottom Layer w20: U6.1 v1@5020.87,3154.87 ; v1(5072,3319) 5086,3333 v1(5284,3333)
UART_RX1: P3.2 U3.69 | length 815.6
  Top Layer w8: v1(3481,3849) 3503,3871 3503,3917 3472,3948 3472,4131.95 3495.11,4155.06 U3.69
  Bottom Layer w8: P3.2 3149,3849 v1(3481,3849)
UART_TX1: P3.3 U3.68 | length 885.7
  Top Layer w8: v1@3468,3888 3468,3929.37 3456,3941.37 3456,4144 3475.43,4163.43 U3.68 ; v1(3471,3888) v1@3475.43,3892.43
  Bottom Layer w8: P3.3 3000,3826 3062,3888 v1(3471,3888)
VBUS: C14.1 C21.1 P4.1 U13.1 | length 1786.9
  Top Layer w30: v1(3155,2380) 3155,2603 3101,2657 C14.1 3101,2851 3165,2915 3165,2994 ; C21.1 3165,2994 ; U13.1 3330.92,2994 3165,2994
  Bottom Layer w30: v1(3155,2380) 3175,2360 3760,2360 P4.1
VDD3V3: C8.1 C9.1 C10.1 C11.1 C12.1 C13.1 C18.2 C20.2 C23.2 C42.1 D4.K LED5.1 R1.1 R7.1 R10.2 R18.2 R19.2 R20.2 R21.2 R22.2 R23.2 tp3.1 U2.2 U2.4 U3.11 U3.28 U3.50 U3.75 U3.100 U4.4 | length 8318.2
  Top Layer w8: R10.2 C8.1 3127.5,4779 3127.5,4734.5 ; C11.1 3077.79,4219.29 U3.50 3137.78,4294.78 v1(3167,4324) ; U3.28 3120.85,4727.85 3127.5,4734.5 ; v1(3159,4731) 3131,4731 3127.5,4734.5 ; v1(3410,4325) v1@3416.37,4331.37 ; v1(3416.37,4731) U3.11 3416.37,4871.37 3464,4919 3464,4955.5 C12.1 ; v1(3585,4732) 3620.22,4767.22 U3.100 3676.21,4832.71 C9.1 3693.5,5025.5 v1(3704,5036) ; R7.1 3613.22,4043.72 U3.75 v1@3613.22,4283.78 ; C13.1@3686.71,4231.79 C13.1 3695,4226.5 v1(3695,4265) ; R1.1 3835,5017 v1(3839,5013) ; v1(4340,2523) 4341,2524 C23.2
  Top Layer w20: tp3.1 2612.58,4817.42 D4.K ; U2.2 2554,4690.42 D4.K ; C18.2 C42.1 C10.1 2738.5,4742 ; LED5.1 C20.2 2738.5,4742 ; v1@3416.37,4331.37 v1(3416.37,4509) v1(3416.37,4731) ; v1@3857.5,4521.5 R20.2 R21.2 R19.2 R18.2 R22.2 R23.2 4238,4483.5 4238,3687 4373,3552 v1(4373,3509) ; v1(4773,2489) 4785,2501 v1(4785,3511) ; D4.K 2731.5,4749 2738.5,4742
  Bottom Layer w8: v1@3168,4325 v1(3410,4325) 3572,4325 v1(3613,4284) 3676,4284 v1(3695,4265) ; v1(3416.37,4731) 3584,4731 v1(3585,4732) ; v1(3704,5036) 3816,5036 v1(3839,5013) ; v1(4340,2523) 4379.92,2562.92 U4.4
  Bottom Layer w20: v1(2690,4750) 2709,4731 v1(3159,4731) v1(3416.37,4731) ; v1(3416.37,4509) 3845,4509 v1(3857,4521) ; v1(4340,2523) 4374,2489 v1(4773,2489) ; v1(4373,3509) 4376,3512 v1@4785,3512
VDD4V2: C26.1 C27.2 LED3.1 R33.2 R34.2 R37.2 tp5.1 U5.55 U5.56 U5.57 U7.4 | length 4634.8
  Top Layer w8: U5.55 5324.29,4824.29 tp5.1 5420,4920 R34.2 ; LED3.1 v1(5861,4650)
  Top Layer w20: R33.2@4005.79,2850 U7.4
  Top Layer w30: U7.4 4005.79,3072.79 v1(4008,3075) ; C26.1 4281.5,2918.5 C27.2 R37.2 4302,3230 4350,3278 v1(4350,3439) ; U5.57 U5.56 ; v1(5285,4595) 5284.92,4595.08 U5.56 ; U5.55 U5.56 ; v1(5644,3440) 5667,3463 v1(5667,4565)
  Bottom Layer w8: 5637,4595 5692,4650 v1(5861,4650)
  Bottom Layer w30: v1(4008,3075) 4276,3075 v1(4278,3077) ; v1(4350,3439) 5192,3439 ; 5193,3440 v1(5644,3440) ; v1(5285,4595) 5637,4595 v1(5667,4565)
VDD5V: C1_CA1.2 C1_CA2.2 C15.2 C41.1 D9.K D11.K LED7.1 tp4.1 U1_CA1.3 U1_CA2.3 U2.3 U7.1 U7.2 U13.4 | length 6666.7
  Top Layer w10: C1_CA2.2 2305,4064.5 v1(2305,4050) U1_CA2.3
  Top Layer w20: v1(2298,3390) 2298,3290.5 C1_CA1.2 2305,3264.5 U1_CA1.3 ; v1(2697,4201) 2647,4201 ; v1(2699,3416) 2699,3980 v1(2647,4032) 2647,4201 ; C41.1@2738.5,4455.9 LED7.1 2738.5,4390 2664.6,4390 U2.3 2644.55,4244.55 tp4.1 2647,4233 2647,4201 ; U7.2 3871.93,2906.07 3891,2887 3928,2887 3940,2875 3940,2801 3967,2774 4094.74,2774 D11.K ; v1(4456,4265) 4500,4309 D9.K
  Top Layer w30: C41.1 C15.2 ; v1(2971,3412) 2982,3401 v1(2982,2955) ; U13.4 3546.93,2892.07 3560,2879 3647,2879 v1(3702,2934) 3743,2975 U7.1 U7.2
  Bottom Layer w20: v1(2298,3390) 2673,3390 v1(2699,3416) ; v1(2305,4050) 2629,4050 v1(2647,4032) ; v1(2697,4201) 2736,4201 2744,4209 4400,4209 v1(4456,4265)
  Bottom Layer w30: v1(2699,3416) 2703,3412 v1(2971,3412) ; v1(2982,2955) 3003,2934 v1(3702,2934)
VDDA: C4.1 C5.1 R10.1 R11.2 U3.19 U3.22 | length 828.3
  Top Layer w8: v1(2950,4777) 2950,4902 2963,4915 R10.1 R11.2 ; U3.22 v1(3199.83,4770.17) 3207,4763 3244,4763 3258.89,4777.89 U3.19 3258.89,4887.39 C4.1 C5.1
  Bottom Layer w8: v1(2950,4777) 2956.83,4770.17 v1(3199.83,4770.17)
VREF+: R11.1 U3.21 | length 282.6
  Top Layer w8: R11.1 3057.5,4979 3147,4979 3176,4950 3176,4898 3194,4880 3216,4880 3219.52,4876.48 U3.21
VREF-: C4.2 C5.2 R12.1 U3.20 | length 333.5
  Top Layer w8: R12.1 3130,5045 3223.5,4951.5 C4.2 3239.2,4899.3 U3.20
pads on no net: P4.4 U1_CA1.5 U1_CA2.5 U3.6 U4.10 U4.11 U4.12 U4.13 U5.2 U5.3 U5.5 U5.6 U5.7 U5.8 U5.11 U5.12 U5.13 U5.14 U5.15 U5.19 U5.20 U5.21 U5.22 U5.23 U5.24 U5.25 U5.27 U5.28 U5.34 U5.35 U5.36 U5.37 U5.38 U5.40 U5.41 U5.42 U5.43 U5.44 U5.47 U5.48 U5.49 U5.50 U5.51 U5.66 U5.67 U5.68 U6.0 U6.6 U6.9
copper on no net:
  other v2: 4898.03,2888.19 5425.59,2888.19
  other v3: 4218.5,2186.61 4533.46,2186.61

## Polygon pours and split planes (outlines as drawn)
DGND on Top Layer "Top Overlay-No Net" (solid, remove dead copper, pour order 1000): 1900,5400 6000,5400 6000,1900 1900,1900
DGND on Bottom Layer "Top Overlay-No Net" (solid, remove dead copper, pour order 1001): 1900,5400 6000,5400 6000,2000 6100,1900 6000,1900 1900,1900

## Keep-outs
Keep-Out Layer:
  the board outline again, w10

## Other copper
Top Layer:
  pour cut-out: 5040,4570 5180,4570 5180,4430 5040,4430
  pour cut-out: 4840.04,4295.28 5060.51,4295.28 5060.51,4074.8 4840.04,4074.8

## Silkscreen, mask and mechanical layers (free items; w line width, h text height)
Top Overlay:
  text "IO" at 4651,4892 h30 r90
  text "key" at 4850,4865 h30 r90
  text "GND" at 3795,3615 h60 r90
  text "TDO" at 3585,3610 h60 r90
  text "TCK" at 3695,3609 h60 r90
  text "RXD" at 3134,3563 h60 r90
  text "GND" at 3243,3563 h60 r90
  text "TXD" at 3026,3559 h60 r90
  text "CAN1H" at 2510,2533 h60 r90
  text "CAN1L" at 2597,2527 h60 r90

## Text inside footprints (layer, text, board x,y; h text height)
P6: Top Overlay "2" at 4190,4800 h50; Top Overlay "1" at 4210,4700 h50; Top Overlay "7" at 4650,4700 h50; Top Overlay "8" at 4650,4800 h50
U4: Bottom Overlay "TF CARD" at 4489.7,2400.36 h42; Bottom Overlay "KINMOX" at 4457.7,2300.36 h42